# Altium PCB 89C51.PcbDoc
Units mil, origin at the board's own origin, x right, y up, seen from the top; angles counter-clockwise.
Board outline 6000 x 4000 mil, 2 copper layers (Top Layer, Bottom Layer); 34 components, 44 nets, 179 pads, 32 vias.
Unrouted connection lines stored in the file: 1.
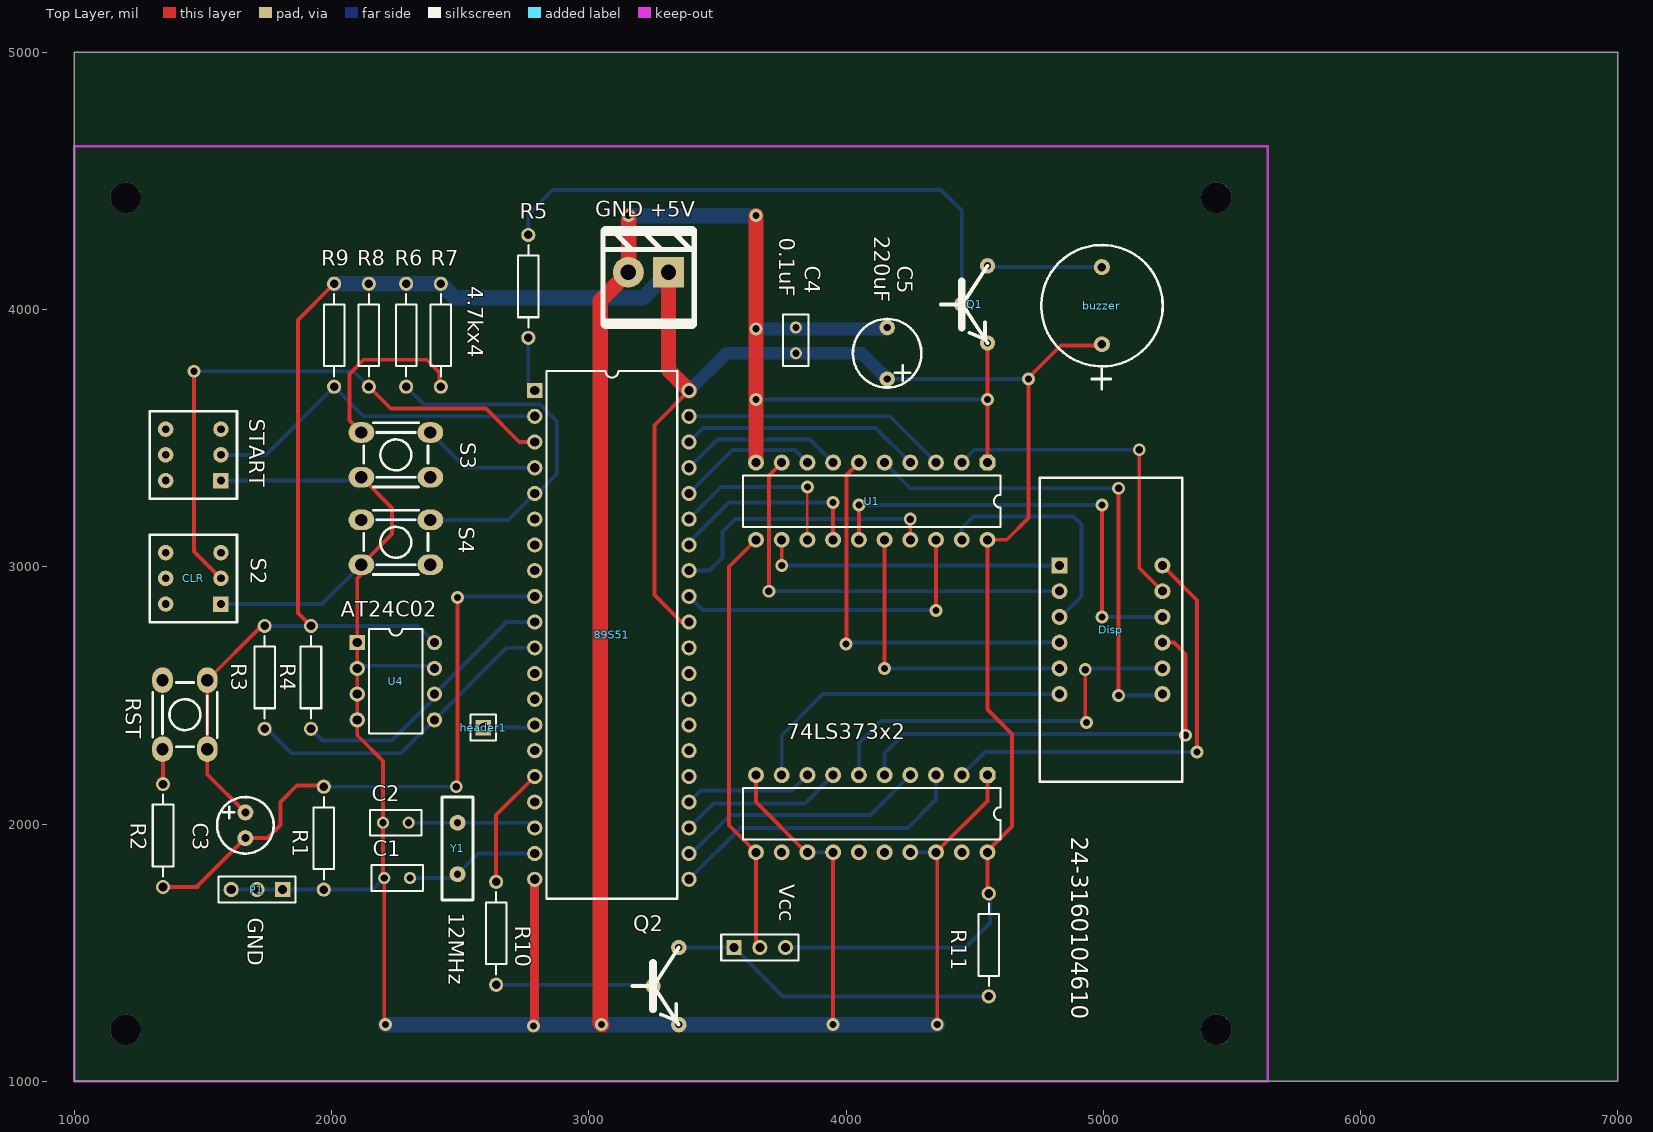
[diagram p0: Top Layer view]
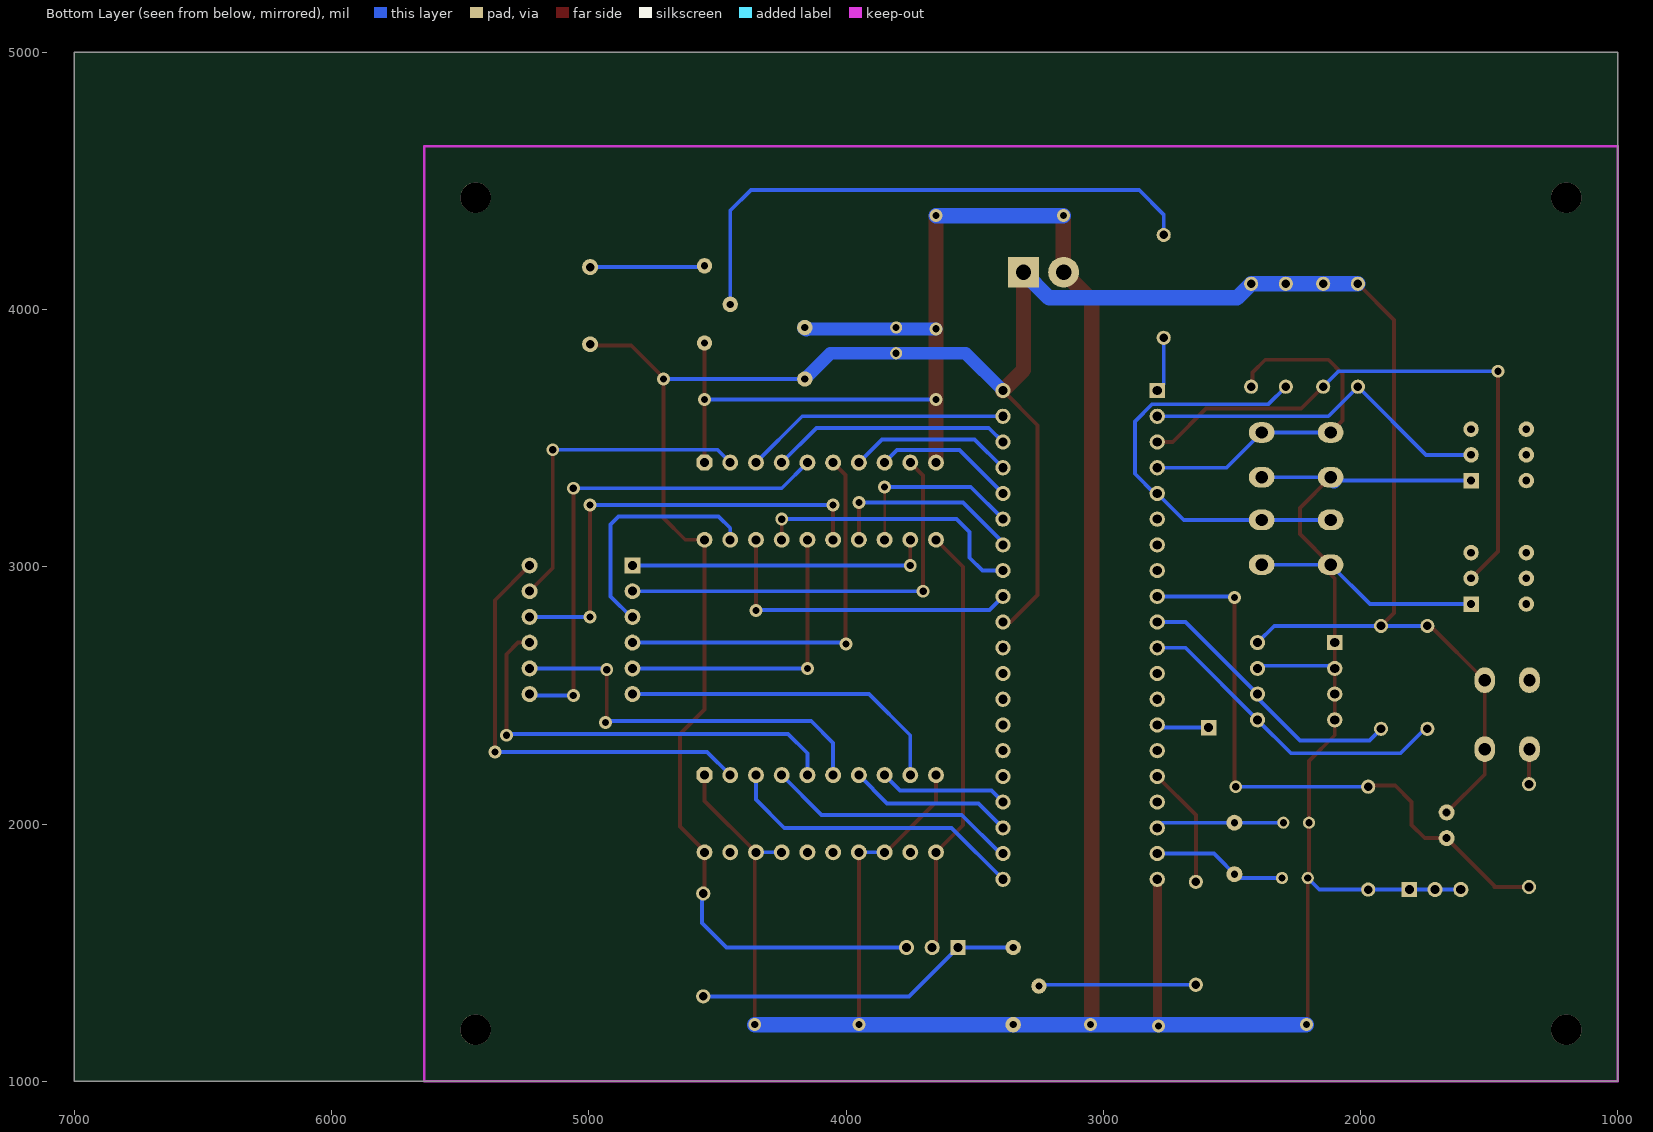
[diagram p1: Bottom Layer view, seen from below]

## Layer stack, top to bottom
Top Layer: signal copper 1.4
Dielectric: dielectric 12.6, FR-4, Dk 4.8
Bottom Layer: signal copper 1.4

## Board outline
1000,1000 7000,1000 7000,5000 1000,5000

## Design rules (kind name [scope] priority, off if disabled: settings)
Clearance [All] p1: gap=10
PolygonConnect [All] p1: connectstyle=Relief reliefconductorwidth=10 reliefentries=4 polygonreliefangle="90 Angle"
RoutingVias [All] p1: holewidth=28 width=50 viastyle="Through Hole" minholewidth=28 minwidth=50 maxholewidth=28 maxwidth=50
SilkscreenOverComponentPads [IsPad] p1: minsilkscreentomaskgap=10
SolderMaskExpansion [All] p1: expansion=4
TestPointUsage [All] p1: valid=0 allowmultiple=FALSE
Testpoint [All] p1: side=3 testpointundercomponent=TRUE minsize=40 maxsize=100 preferedsize=60 minholesize=0 maxholesize=40 preferedholesize=32 testpointgrid=1 style=297 order=0-112345678
Width [All] p1: maxlimit=100 minlimit=10 preferedwidth=15
23 further rules are at their usual default settings.

## Components (designator, comment, footprint, x,y, rotation, side; value= is the part's Value field where it differs from the comment)
74LS373x2 "74LS373" DIP-20 4550,2190 r270 top (schematic designator U2)
89S51 "AT89S51" DIP-40 3090,2735 r270 top (schematic designator U3)
buzzer "Header 2" BUZZER 4995,3865 r90 top
C1 "30pF" RAD-0.1 2255,1790 r0 top
C2 "30pF" RAD-0.1 2250,2005 r0 top
C3 "10uF" RB.2/.1 1665,2045 r270 top
C4 "0.1uF" RAD-0.1 3805,3880 r90 top
C5 "220uF" RB.2/.2 4160,3730 r90 top
CLR "S2" push_switch 1570,2855 r180 top
Disp "3461AS" 3461AS 4830,3005 r0 top
"GND +5V" "Header 2" "POWER PLUG2" 3310,4145 r0 top (schematic designator P2)
header1 "HDR_1" HDR_1 2590,2375 r90 top
P1 "GND" HDR1X3 1810,1745 r180 top
Q1 "S8050" NPN-2 4550,3870 r0 top
Q2 "S8050" NPN-2 3350,1220 r0 top
R1 "10k" AXIAL-0.4 1970,1945 r90 top
R2 "200" AXIAL-0.4 1345,1955 r270 top
R3 "10K" AXIAL-0.4 1740,2570 r270 top
R4 "10K" AXIAL-0.4 1920,2570 r270 top
R5 "1K" AXIAL-0.4 2765,4090 r90 top
R6 "4.7k" AXIAL-0.4 2290,3900 r270 top
R7 "4.7kx4" AXIAL-0.4 2425,3900 r270 top
R8 "4.7k" AXIAL-0.4 2145,3900 r270 top
R9 "4.7k" AXIAL-0.4 2010,3900 r270 top
R10 "1K" AXIAL-0.4 2640,1575 r90 top
R11 "10K" AXIAL-0.4 4555,1530 r90 top
RST "SW-PB" AN-S 1430,2425 r90 top
S3 "SW-PB" AN-S 2250,3435 r180 top
S4 "SW-PB" AN-S 2250,3095 r180 top
START "" push_switch 1570,3335 r180 top
U1 "74LS373" DIP-20 4550,3405 r270 top
U4 "AT24C02" DIP-8 2250,2555 r270 top
Vcc "Header 3" HDR1X3 3565,1520 r0 top (schematic designator P2)
Y1 "12MHz" XTAL-1 2490,2005 r270 top

## Footprints (in the part's own frame and the unit in brackets; to place one, negate y for a bottom-side part, rotate by r counter-clockwise, add the part's x,y. Pads: shape width x height; smd on the part's side, far side on the other; paste and mask are expansions set on the pad)
3461AS [mil]
  rect 62x62 hole 35: 1(0,0)
  round 62 hole 35: 2(0,-100) 3(0,-200) 4(0,-300) 5(0,-400) 6(0,-500) 7(400,-500) 8(400,-400) 9(400,-300) 10(400,-200) 11(400,-100) 12(400,0)
  silkscreen extent -77,-841 477,341
AN-S [mil]
  oval 100x80 hole 48: 1(-134,87) 1(134,87) 2(-134,-87) 2(134,-87)
  silkscreen extent -125,-125 125,125
AXIAL-0.4 [mm] "Resistor; 2 Leads"
  round 1.4 hole 0.85: 1(-5.08,0) 2(5.08,0)
  silkscreen extent -4.06,-1.02 4.06,1.02
BUZZER [mil]
  round 62 hole 33: 1(0,0) 2(300,0)
  silkscreen extent -175,-236 386,236
DIP-8 [mm] "DIP; 8 Leads; Row Spacing 7.62 mm; Pitch 2.54 mm"
  rect 1.5x1.5 hole 0.9: 1(-3.81,-3.81)
  round 1.5 hole 0.9: 2(-1.27,-3.81) 3(1.27,-3.81) 4(3.81,-3.81) 5(3.81,3.81) 6(1.27,3.81) 7(-1.27,3.81) 8(-3.81,3.81)
  silkscreen extent -5.15,-2.65 5.15,2.65
DIP-20 [mil]
  oct 62x62 hole 35: 1(0,0)
  round 62 hole 35: 2(0,-100) 3(0,-200) 4(0,-300) 5(0,-400) 6(0,-500) 7(0,-600) 8(0,-700) 9(0,-800) 10(0,-900) 11(300,-900) 12(300,-800) 13(300,-700) 14(300,-600) 15(300,-500) 16(300,-400) 17(300,-300) 18(300,-200) 19(300,-100) 20(300,0)
  silkscreen extent 50,-950 250,50
DIP-40 [mm]
  rect 1.5x1.5 hole 0.9: 1(-24.13,-7.62)
  round 1.5 hole 0.9: 2(-21.59,-7.62) 3(-19.05,-7.62) 4(-16.51,-7.62) 5(-13.97,-7.62) 6(-11.43,-7.62) 7(-8.89,-7.62) 8(-6.35,-7.62) 9(-3.81,-7.62) 10(-1.27,-7.62) 11(1.27,-7.62) 12(3.81,-7.62) 13(6.35,-7.62) 14(8.89,-7.62) 15(11.43,-7.62) 16(13.97,-7.62) 17(16.51,-7.62) 18(19.05,-7.62) 19(21.59,-7.62) 20(24.13,-7.62) 21(24.13,7.62) 22(21.59,7.62) 23(19.05,7.62) 24(16.51,7.62) 25(13.97,7.62) 26(11.43,7.62) 27(8.89,7.62) 28(6.35,7.62) 29(3.81,7.62) 30(1.27,7.62) 31(-1.27,7.62) 32(-3.81,7.62) 33(-6.35,7.62) 34(-8.89,7.62) 35(-11.43,7.62) 36(-13.97,7.62) 37(-16.51,7.62) 38(-19.05,7.62) 39(-21.59,7.62) 40(-24.13,7.62)
  silkscreen extent -26.05,-6.45 26.05,6.45
HDR1X3 [mm] "Connector; Header; 3 Position"
  rect 1.5x1.5 hole 0.9: 1(0,0)
  round 1.5 hole 0.9: 2(2.54,0) 3(5.08,0)
  silkscreen extent -1.27,-1.27 6.35,1.27
HDR_1 [mil]
  rect 60x60 hole 35: 1(0,0)
  silkscreen extent -50,-50 50,50
NPN-2 [mil]
  round 60 hole 28: 1(0,0) 2(-100,150) 3(0,300)
  silkscreen extent -180,0 0,300
"POWER PLUG2" [mil]
  rect 120x120 hole 60: 1(0,0)
  round 120 hole 60: 2(-156,0)
  silkscreen extent -255,-204 100,164
push_switch [mil]
  rect 60x60 hole 30: 1(0,0)
  round 60 hole 30: 2(0,-100) 3(0,-200) 4(215,0) 5(215,-100) 6(215,-200)
  silkscreen extent -63,-270 278,70
RAD-0.1 [mm] "Indicating Instrument; 2 Leads"
  round 1.2 hole 0.7: 1(-1.27,0) 2(1.27,0)
  silkscreen extent -2.54,-1.27 2.54,1.27
RB.2/.1 [mil]
  round 62 hole 31: 1(0,0) 2(100,0)
  silkscreen extent -60,-110 160,110
RB.2/.2 [mil]
  round 60 hole 28: 1(0,0) 2(200,0)
  silkscreen extent -33,-133 233,133
XTAL-1 [mil]
  round 62 hole 28: 1(0,0) 2(200,0)
  silkscreen extent -100,-60 300,60

## Part data
89S51: "8-Bit Microcontroller with 4K ISP Flash ROM"
buzzer "GND +5V": "Header, 2-Pin"
C1 C2 C3 C4 C5: library part CAP, "Capacitor"
CLR START: library part SW-SPST, "Single-Pole, Single-Throw Switch"
Disp: library part HDSP-B03E, "14.22 mm GaP HER, Untinted, 88:88 4-Digit 7-Segment Display: CC, Gray Surface"
P1: library part "Header 3", "Header, 3-Pin"
Q1 Q2: library part 2N3904, "NPN General Purpose Amplifier"
R1 R2 R3 R4 R5 R6 R7 R8 R9 R10 R11: library part Res2, "Resistor"
RST S3 S4: "Switch"
Vcc: "Header, 3-Pin"
Y1: library part XTAL, "Crystal Oscillator"

## Free pads (board coordinates)
  round 118 hole 118: 0(1200,1200) 1(5440,1200) 2(5440,4435) 3(1200,4435)

## Via types
v1: diameter 50, hole 28, Top Layer to Bottom Layer, 32 vias

## Nets (pads, with @x,y where several pads share a name; then routed paths per layer and width w, separated by ;. In a path a pad name is that pad's centre, name@x,y a point inside that pad or via, vN(x,y) a via of type N, cw(c..) or ccw(c..) an arc to the next point about the centre after c; other vN are vias at no path point)
GND: 74LS373x2.1 74LS373x2.10 74LS373x2.13 74LS373x2.14 74LS373x2.17 74LS373x2.18 89S51.20 "GND +5V.2" C1.1 C2.1 C4.2 C5.2 CLR.1 P1.1 P1.2 P1.3 Q1.1 Q2.1 R1.1 S3.1 S4.1 START.1 U1.1 U1.10 U4.1 U4.2 U4.3 U4.4 U4.7 | length 16603.7
  Top Layer w15: S3.1@2116,3348 2235,3229 2235,3127 2116,3008 2116,2971 2100,2955 U4.4 2100,2345 2200,2245 2200,2135 ; C1.1@2200,1785 C2.1 2200,2215 ; C1.1 2205,1225 v1(2210,1220) ; 74LS373x2.10 3650,2085 3845,1890 74LS373x2.13 ; v1@3950,1215 74LS373x2.14 ; v1(4355,1220) 4355,1885 74LS373x2.18 4550,2090 74LS373x2.1 ; U1.1 v1(4550,3650) 4550,3830 Q1.1@4550,3880
  Top Layer w35: v1(2785,1215) 2790,1220 89S51.20@2790,1790
  Top Layer w60: v1(3050,1220) 3045,1225 3045,4036 3154,4145 ; 3154,4124.43 3154,4145 ; v1(3155,4365) 3155,4146 3154,4145 ; U1.10@3650,3405.41 v1(3650,3925) v1(3650,4365)
  Bottom Layer w15: CLR.1 1963,2855 2116,3008 S4.1@2384,3008 ; START.1 S3.1@2103,3335 ; P1.3 R1.1 2160,1745 C1.1 ; U4.2@2100,2615 U4.7@2400,2615 ; S3.1@2116,3348 S3.1@2384,3348 ; v1(3650,3650) v1(4550,3650) ; 74LS373x2.13 74LS373x2.14 ; 74LS373x2.17 74LS373x2.18
  Bottom Layer w50: v1(3650,3925) C5.2@4155,3925
  Bottom Layer w60: v1(2210,1220) v1(4355,1220) ; 3154,4124.43 3154,4145 ; v1(3155,4365) v1(3650,4365) ; C5.2@4155,3925 C5.2 ; S3.1@2103,3335 2116,3348 S3.1@2103,3335
  other v1: 3950,1220
Net74LS373x2_2: 74LS373x2.2 Disp.12 | length 1738.2
  Top Layer w15: Disp.12 5365,2870 v1@5365,2275
  Bottom Layer w15: 74LS373x2.2 4540,2280 v1(5365,2280)
Net74LS373x2_3: 74LS373x2.3 89S51.21 | length 1183.4
  Bottom Layer w15: 89S51.21 3590,1985 4240,1985 4350,2095 74LS373x2.3
Net74LS373x2_4: 74LS373x2.4 89S51.22 | length 986.3
  Bottom Layer w15: 89S51.22 3400,1885 3550,2035 4095,2035 74LS373x2.4
Net74LS373x2_5: 74LS373x2.5 Disp.9 | length 1714.7
  Top Layer w15: Disp.9 5275,2705 5320,2660 v1@5320,2340
  Bottom Layer w15: 74LS373x2.5 4150,2275 4225,2350 5290,2350 v1@5320,2350
  other v1: 5320,2345
Net74LS373x2_6: 74LS373x2.6 Disp.8 | length 1556.4
  Top Layer w15: v1(4930,2600) 4930,2400 v1(4935,2395)
  Bottom Layer w15: 74LS373x2.6 4050,2315 4135,2400 4930,2400 v1(4935,2395) ; v1(4930,2600) 4935,2605 Disp.8
Net74LS373x2_7: 74LS373x2.7 89S51.23 | length 644.9
  Bottom Layer w15: 89S51.23 3485,2080 3840,2080 74LS373x2.7
Net74LS373x2_8: 74LS373x2.8 89S51.24 | length 503.5
  Bottom Layer w15: 89S51.24 3435,2130 3790,2130 74LS373x2.8
Net74LS373x2_9: 74LS373x2.9 Disp.6 | length 1301.3
  Bottom Layer w15: 74LS373x2.9 3750,2345 3910,2505 Disp.6
Net74LS373x2_11: 74LS373x2.11 U1.11 Vcc.2 | length 1678.2
  Top Layer w15: U1.11 3545,3000 3545,1995 74LS373x2.11 3650,1535 Vcc.2
Net89S51_1: 89S51.1 R5.1 | length 215.4
  Bottom Layer w15: R5.1 2765,3710 89S51.1
Net89S51_2: 89S51.2 R9.2 START.2 | length 1377.4
  Bottom Layer w15: START.2 1745,3435 R9.2 2125,3585 89S51.2
Net89S51_3: 89S51.3 CLR.2 R8.2 | length 2297.4
  Top Layer w15: v1@1465,3765 1465,3060 CLR.2 ; R8.2 2230,3615 2600,3615 2730,3485 89S51.3
  Bottom Layer w15: v1@1460,3760 2085,3760 R8.2
  other v1: 1465,3760
Net89S51_4: 89S51.4 R7.2 S3.2 | length 1428.4
  Top Layer w15: S3.2@2116,3522 2070,3568 2070,3750 2125,3805 2370,3805 2420,3755 2420,3705 R7.2
  Bottom Layer w15: S3.2@2116,3522 2384,3522 2521,3385 89S51.4
Net89S51_5: 89S51.5 R6.2 S4.2 | length 1680.8
  Bottom Layer w15: S4.2@2116,3182 2384,3182 2687,3182 89S51.5 2800,3285 2876.51,3361.51 2876.51,3565 2809.48,3632.03 2357.97,3632.03 R6.2
Net89S51_9: 89S51.9 C3.2 R1.2 R2.2 | length 2441.7
  Top Layer w15: R2.2 1470,1755 ; 1480,1755 1470,1755 ; C3.2 1475,1755 1470,1755 ; C3.2@1670,1945 1750,1945 1801.25,1996.25 1801.25,2086.25 1865,2150 R1.2@1975,2150 ; v1(2485,2145) 2490,2150 v1(2490,2880)
  Bottom Layer w15: R1.2 v1@2495,2145 ; v1@2485,2880 2490,2885 89S51.9 89S51.9@2775,2870
Net89S51_10: 89S51.10 R4.2 U4.6 | length 1109.2
  Bottom Layer w15: R4.2 1965,2325 2235,2325 2400,2490 U4.6 2680,2785 89S51.10 89S51.10@2775,2770
Net89S51_11: 89S51.11 R3.2 U4.5 | length 1249.2
  Bottom Layer w15: R3.2@1750,2370 1845,2275 2270,2275 U4.5 2680,2685 89S51.11
Net89S51_14: 89S51.14 header1.1 | length 204.1
  Bottom Layer w15: header1.1 2780,2375 89S51.14
Net89S51_16: 89S51.16 R10.2 | length 472.1
  Top Layer w15: R10.2 2640,2035 89S51.16
Net89S51_18: 89S51.18 C2.2 Y1.1 | length 498.3
  Bottom Layer w15: C2.2 Y1.1 2770,2005 89S51.18
Net89S51_19: 89S51.19 C1.2 Y1.2 | length 524.4
  Bottom Layer w15: C1.2 2475,1790 2570,1885 89S51.19
Net89S51_32: 89S51.32 U1.18 | length 1267.8
  Top Layer w15: v1@4350,2825 U1.18
  Bottom Layer w15: 89S51.32 3442.5,2832.5 4352.5,2832.5 v1@4355,2830
  other v1: 4350,2830
Net89S51_33: 89S51.33 U1.17 | length 1081.4
  Top Layer w15: U1.17 v1(4250,3185)
  Bottom Layer w15: 89S51.33 3470,2985 3520,3035 3520,3135 3570,3185 3750,3185 v1(4250,3185)
Net89S51_34: 89S51.34 U1.14 | length 814.2
  Top Layer w15: U1.14 v1@3950,3260
  Bottom Layer w15: 89S51.34 3390,3095 3545,3250 3790,3250 ; 3810,3250 3790,3250 ; v1@3955,3250 3790,3250
  other v1: 3950,3250
Net89S51_35: 89S51.35 U1.13 | length 723.8
  Top Layer w10: U1.13 v1(3850,3310)
  Bottom Layer w15: 89S51.35 3515,3310 v1(3850,3310) v1@3855,3305
Net89S51_36: 89S51.36 U1.8 | length 549.9
  Bottom Layer w15: 89S51.36 3558.5,3453.5 3801.5,3453.5 U1.8
Net89S51_37: 89S51.37 U1.7 | length 642.8
  Bottom Layer w15: 89S51.37 3500,3495 3860,3495 U1.7
Net89S51_38: 89S51.38 U1.4 | length 938.7
  Bottom Layer w15: 89S51.38 3445,3540 4115,3540 U1.4
Net89S51_39: 89S51.39 U1.3 | length 1034.6
  Bottom Layer w15: 89S51.39 4170,3585 U1.3
Netbuzzer_2: buzzer.2 Q1.3 | length 457.1
  Bottom Layer w15: Q1.3@4560,4165 5010,4165 buzzer.2@5015,4170
NetDisp_1: Disp.1 U1.12 | length 1195
  Top Layer w15: v1@3750,2995 U1.12
  Bottom Layer w15: v1@3745,3005 Disp.1
  other v1: 3750,3005
NetDisp_2: Disp.2 U1.9 | length 1670.7
  Top Layer w15: v1@3700,2900 3700,3355 U1.9
  Bottom Layer w15: v1@3685,2905 Disp.2
  other v1: 3700,2905
NetDisp_3: Disp.3 U1.19 | length 939.2
  Bottom Layer w15: U1.19 4450,3150 4495,3195 4885,3195 4915,3165 4915,2885 4835,2805 Disp.3
NetDisp_4: Disp.4 U1.6 | length 1545.1
  Top Layer w15: v1@4001.5,2700 4001.5,3356.5 U1.6
  Bottom Layer w15: v1@4010,2705 Disp.4
  other v1: 4000,2700
NetDisp_5: Disp.5 U1.16 | length 1195
  Top Layer w15: v1@4150,2595 U1.16
  Bottom Layer w15: v1@4145,2605 Disp.5
  other v1: 4150,2605
NetDisp_7: Disp.7 U1.5 | length 1948.5
  Top Layer w15: v1(5060,2500) 5060,3200 v1@5060,3310
  Bottom Layer w15: U1.5 4250,3305 v1@5075,3305 ; v1(5060,2500) 5225,2500 Disp.7
  other v1: 5060,3305
NetDisp_10: Disp.10 U1.15 | length 1755
  Top Layer w15: U1.15 v1(4050,3240) ; v1@4995,2810 v1@4995,3245
  Bottom Layer w15: v1(4050,3240) v1@5000,3240 ; v1(4995,2805) Disp.10
  other v1: 4995,3240
NetDisp_11: Disp.11 U1.2 | length 1308.6
  Top Layer w15: v1@5140,3460 5140,2995 Disp.11
  Bottom Layer w15: U1.2 4500,3455 5143.5,3455 v1@5145,3453.5
  other v1: 5140,3455
NetP2_1: Q2.3 R11.1 Vcc.1 | length 1288.7
  Bottom Layer w15: Q2.3 Vcc.1 3755,1330 R11.1@4560,1330
NetQ1_2: Q1.2 R5.2 | length 2207.5
  Bottom Layer w15: R5.2 2765,4370 2860,4465 4370,4465 4450,4385 Q1.2@4450,4015
NetQ2_2: Q2.2 R10.1 | length 612.1
  Bottom Layer w15: R10.1 3245,1375 Q2.2
NetR2_1: R2.1 RST.1 | length 136.8
  Top Layer w15: RST.1@1343,2291 1345,2289 R2.1
VCC: 74LS373x2.20 89S51.31 89S51.40 "GND +5V.1" buzzer.1 C3.1 C4.1 C5.1 R3.1 R4.1 R6.1 R7.1 R8.1 R9.1 R11.2 RST.2 U1.20 U4.8 Vcc.3 | length 10821.7
  Top Layer w15: C3.1 1517,2193 1517,2198 1517,2291 1517,2559 1728,2770 R3.1 ; 1870,2945 1870,3005 ; R4.1 1870,2820 1870,3005 ; R9.1 1870,3960 1870,3005 ; 89S51.31 3360,2785 3255,2890 3255,3550 89S51.40 ; 74LS373x2.20 4550,1735 R11.2 ; 74LS373x2.20@4550,1895 4645,1990 4645,2350 4550,2445 U1.20 4625,3105 4710,3190 4710,3735 4835,3860 buzzer.1@4990,3860
  Top Layer w60: 3310,4145 3310,3765 89S51.40
  Bottom Layer w15: R3.1 R4.1 2335,2770 U4.8 ; Vcc.3 4465,1520 4560,1615 R11.2@4560,1730 ; C5.1 v1(4710,3730)
  Bottom Layer w50: 89S51.40 3535,3830 C4.1 4060,3830 C5.1
  Bottom Layer w60: R9.1 R7.1 2480,4045 3210,4045 3310,4145
pads on no net: 74LS373x2.12 74LS373x2.15 74LS373x2.16 74LS373x2.19 89S51.6 89S51.7 89S51.8 89S51.12 89S51.13 89S51.15 89S51.17 89S51.25 89S51.26 89S51.27 89S51.28 89S51.29 89S51.30 CLR.3 CLR.4 CLR.5 CLR.6 START.3 START.4 START.5 START.6

## Keep-outs
Keep-Out Layer:
  lines w10: 1000,1000 5640,1000 5640,4635 1000,4635 1000,1000

## Silkscreen, mask and mechanical layers (free items; w line width, h text height)
Top Overlay:
  text "24-3160104610" at 4875,1950 h65 r270